# Altium PCB PCB.PcbDoc
Units mm, origin at the board's own origin, x right, y up, seen from the top; angles counter-clockwise.
Board outline 111.4 x 79.3 mm, 4 copper layers (Top, GND, PWR, Bottom), stack 1.35 mm thick; 107 components, 94 nets, 370 pads, 204 vias.
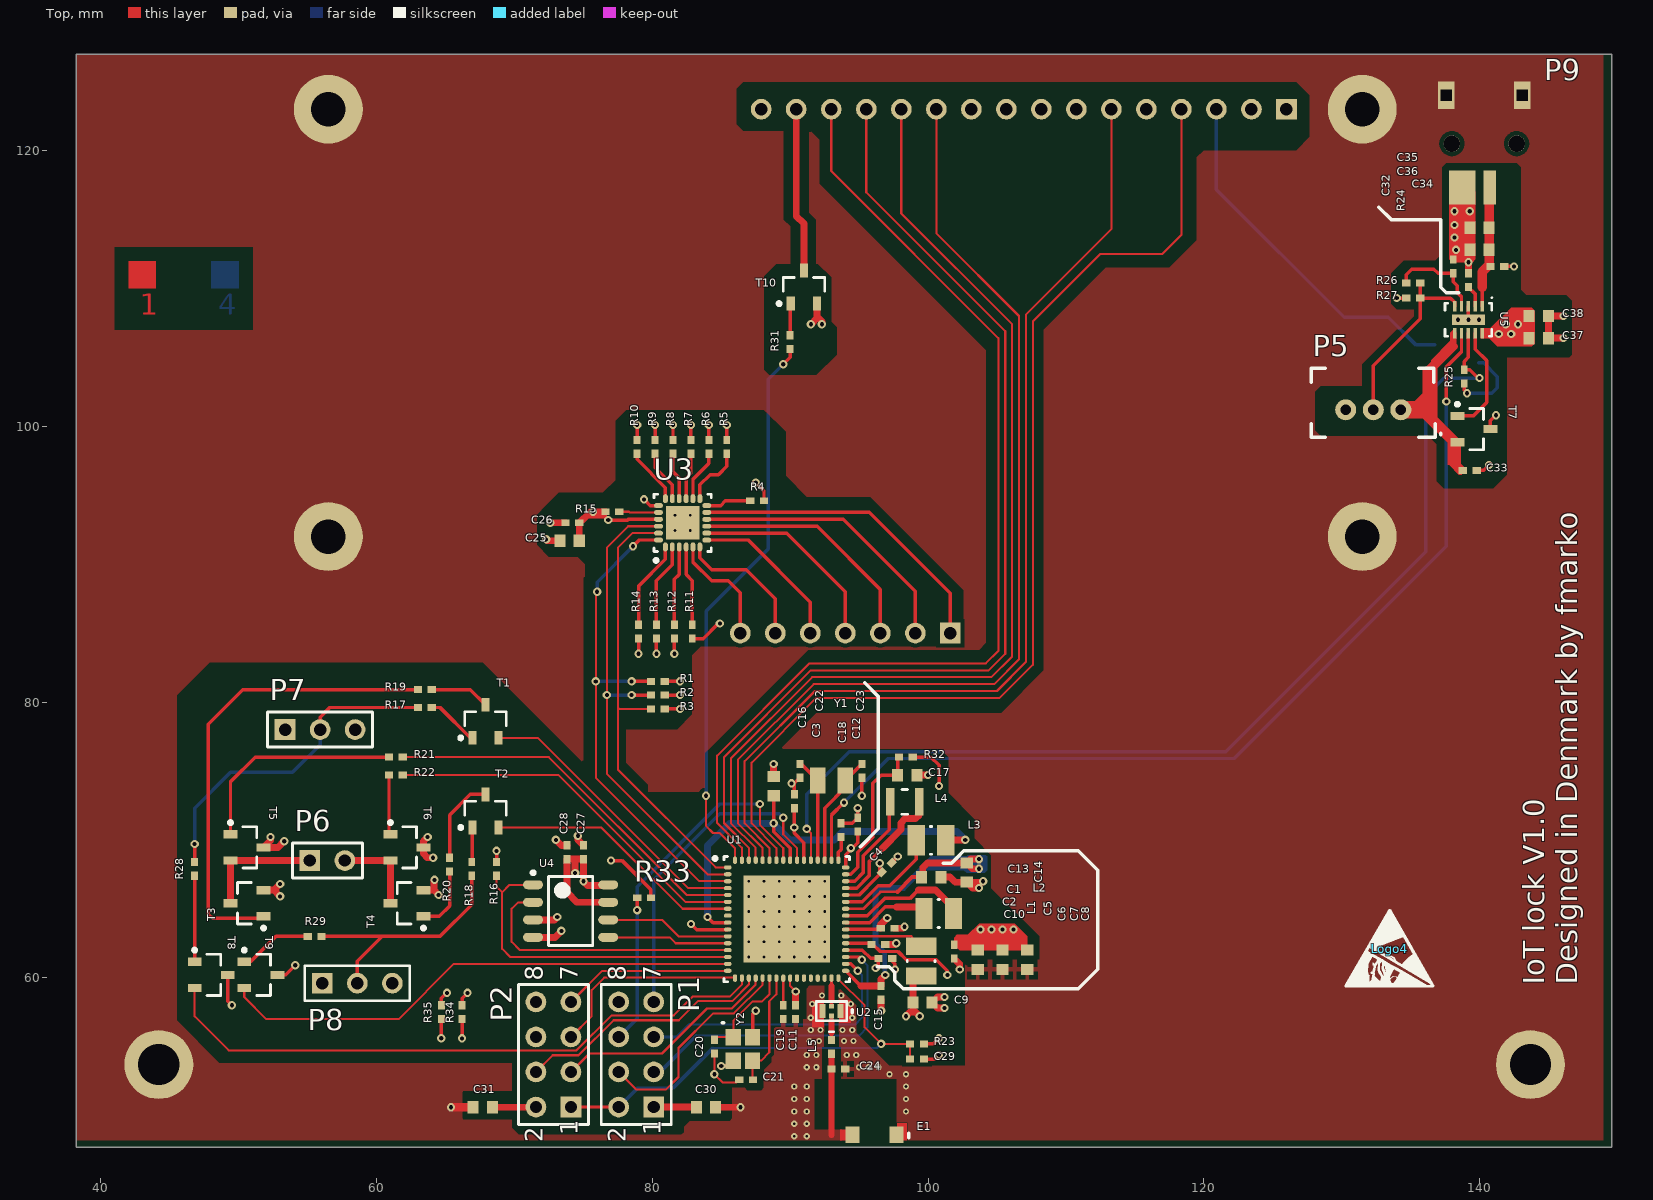
[diagram p0: Top view]
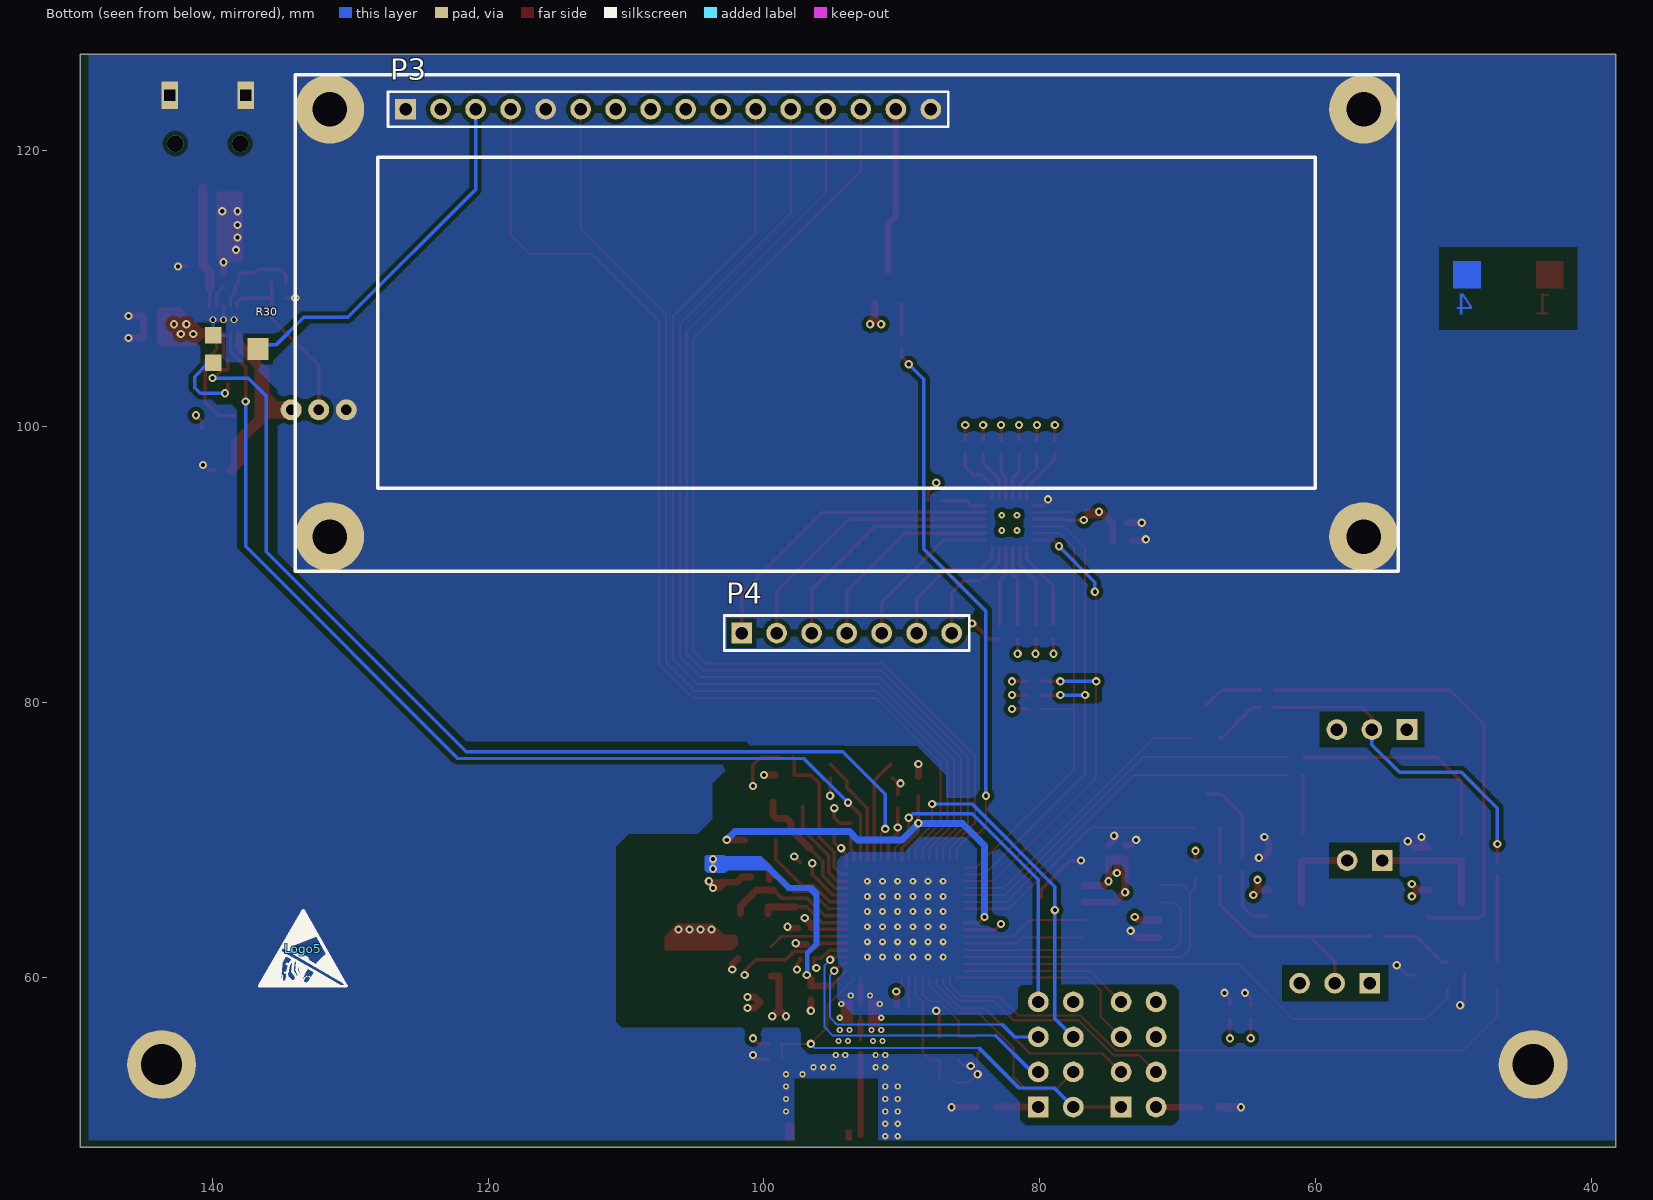
[diagram p1: Bottom view, seen from below]
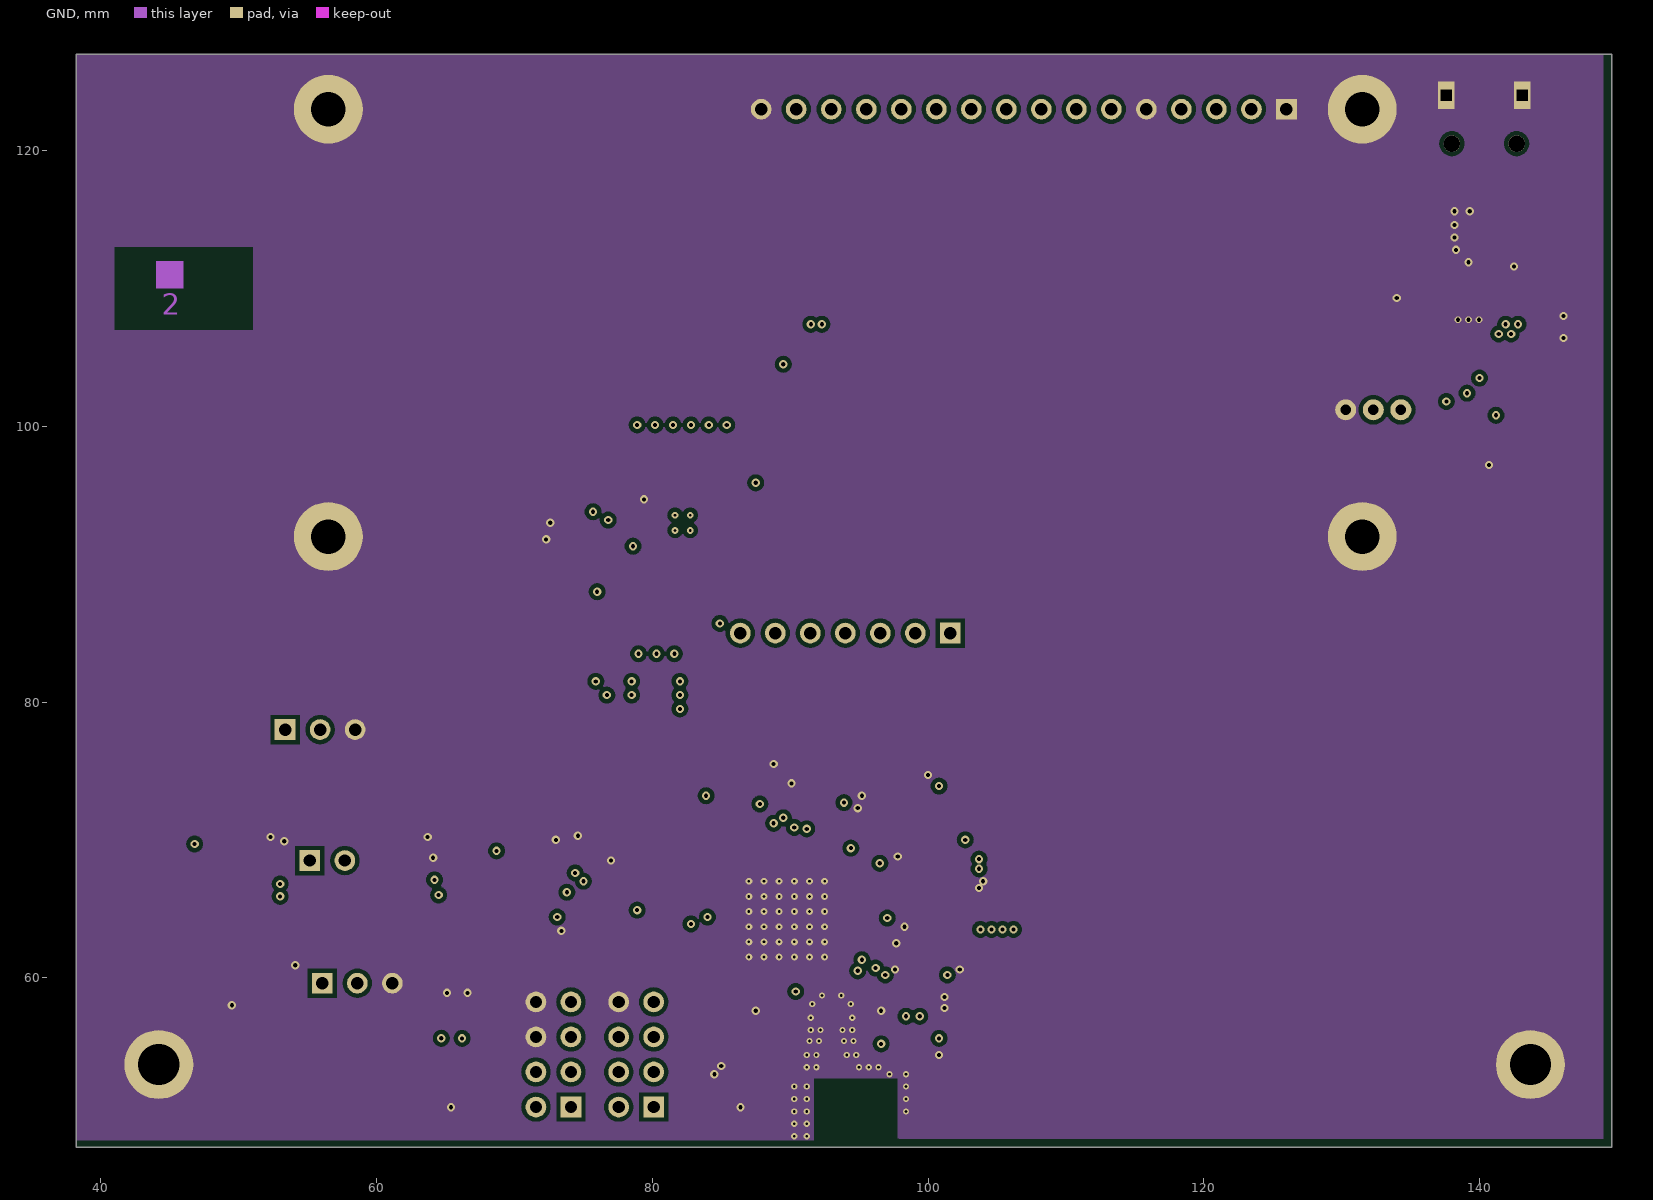
[diagram p2: GND]
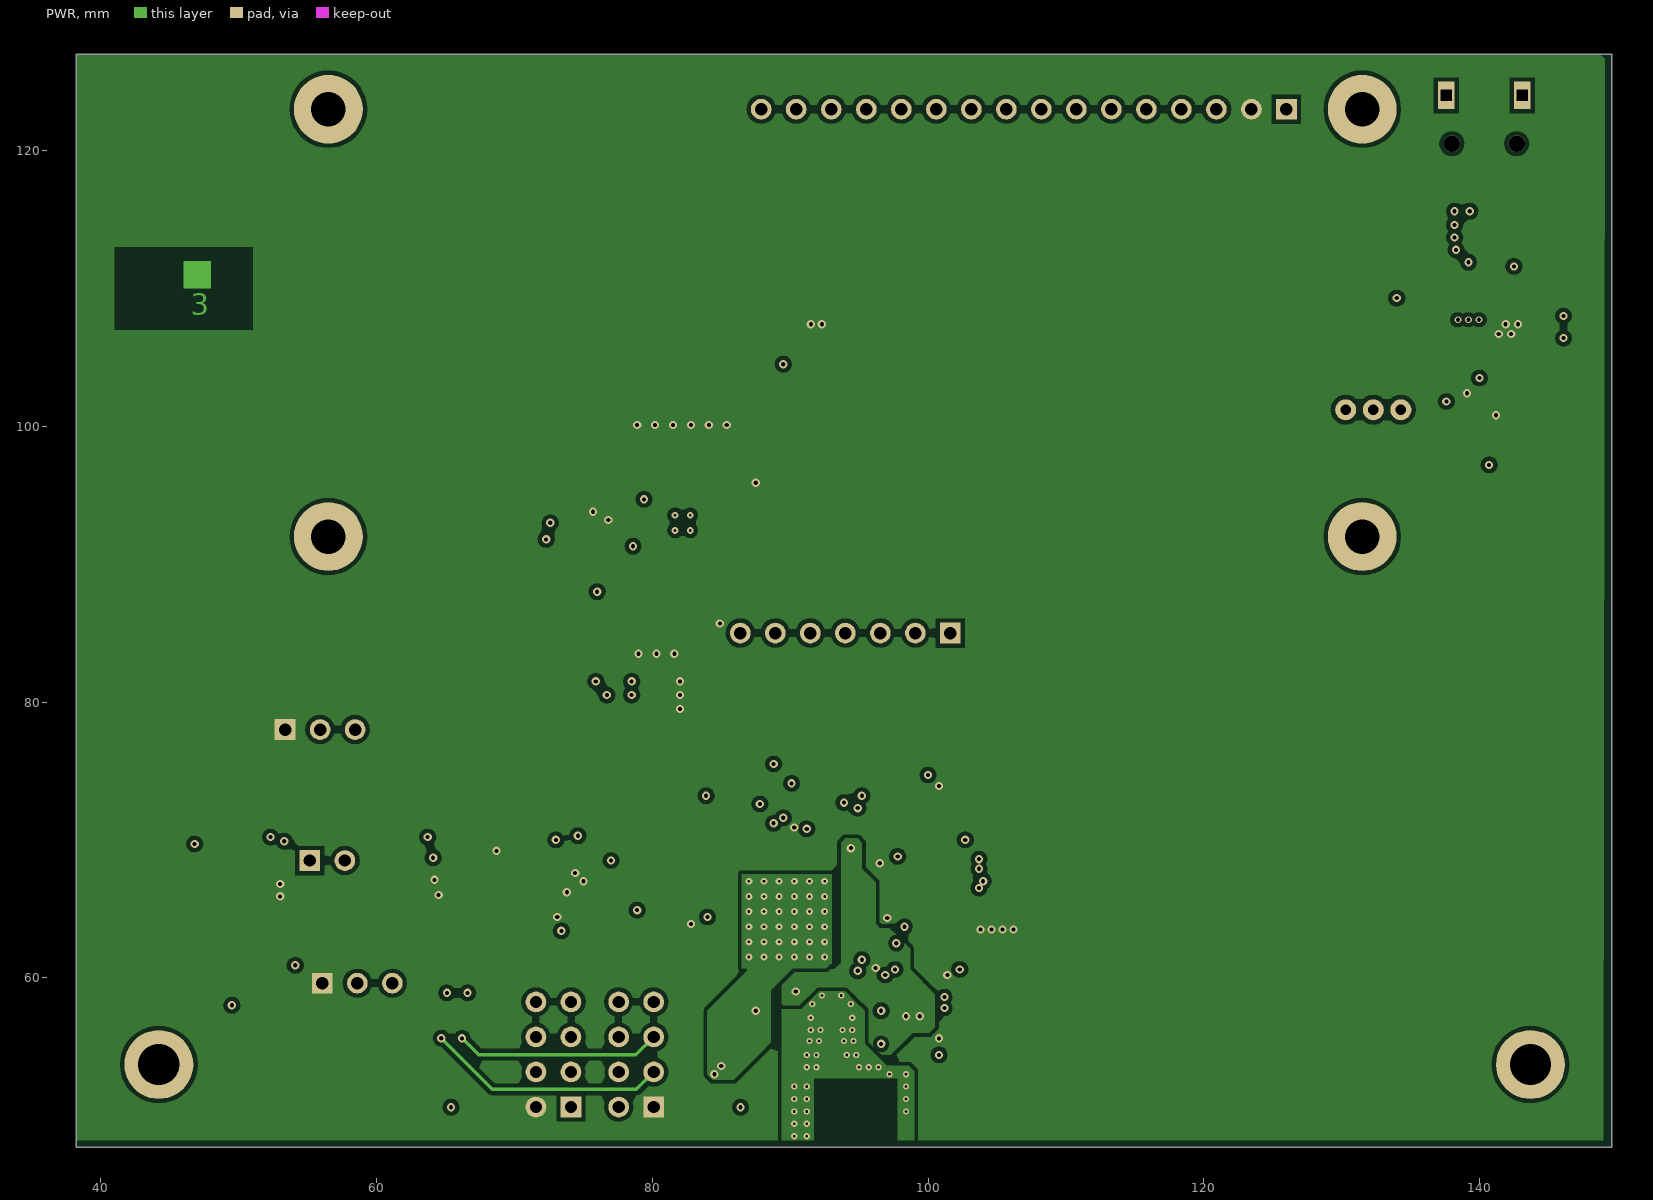
[diagram p3: PWR]

## Layer stack, top to bottom
Top Solder: solder mask 0.025, Solder Resist, Dk 3.5
Top: signal copper 0.035
Dielectric 1: core 0.255, FR-4, Dk 4.5
GND: signal copper 0.035
Dielectric 3: core 0.7, Dk 4.5
PWR: signal copper 0.035
Dielectric 2: core 0.255, Dk 4.5
Bottom: signal copper 0.035
Bottom Solder: solder mask 0.025, Solder Resist, Dk 3.5

## Board outline
38.2,47.7 38.2,127 149.6,127 149.6,47.7

## Design rules (kind name [scope] priority, off if disabled: settings)
Clearance [All] p1: gap=0.1 ignorepadtopadclearanceinfootprint=FALSE except(0.3: Arc-Poly Track-Poly SMDPad-Poly THPad-Poly Via-Poly Fill-Poly Poly-Poly)
PolygonConnect [All] p1: thpad.connectstyle=Direct thpad.reliefconductorwidth=0.254 thpad.reliefentries=4 thpad.polygonreliefangle="90 Angle" thpad.airgapwidth=0.254 smdpad.connectstyle=Relief smdpad.reliefconductorwidth=0.3 smdpad.reliefentries=4 smdpad.polygonreliefangle="90 Angle" smdpad.airgapwidth=0.3 via.connectstyle=Direct via.reliefconductorwidth=0.254 via.reliefentries=4 via.polygonreliefangle="90 Angle" via.airgapwidth=0.254
RoutingVias [All] p1: holewidth=0.711 width=1.27 viastyle="Through Hole" minholewidth=0.711 minwidth=1.27 maxholewidth=0.711 maxwidth=1.27
SolderMaskExpansion [All] p1: expansion=0
Width [All] p1: maxlimit=0.8 minlimit=0.1 preferedwidth=0.25
30 further rules are at their usual default settings.

## Classes and differential pairs
component class SH7: P3 P4 P5 P6 P7 P8 P9 R30 R31 T10
component class SH6: C32 C33 C34 C35 C36 C37 C38 R24 R25 R26 R27 T7 U5
component class SH5: C29 C30 C31 P1 P2 R23 R33 R34 R35
component class SH4: R17 R18 R19 R20 R21 R22 T1 T2 T3 T4 T5 T6
component class SH3: C27 C28 R16 U4
component class SH2: C25 C26 R4 R5 R6 R7 R8 R9 R10 R11 R12 R13 R14 R15 U3
component class SH1: C1 C2 C3 C4 C5 C6 C7 C8 C9 C10 C11 C12 C13 C14 C15 C16 C17 C18 C19 C20 C21 C22 C23 C24 E1 L1 L2 L3 L4 L5 R1 R2 R3 R28 R29 R32 T8 T9 U1 U2 Y1 Y2

## Components (designator, comment, footprint, x,y, rotation, side; value= is the part's Value field where it differs from the comment)
C1 "GRM1555C1HR50BA01D" 0402 97.069,63.59 r180 top value=4.7uF
C2 "GRM1555C1HR50BA01D" 0402 96.4,62.4 r180 top value=4.7uF
C3 "GRM1555C1HR50BA01D" 0402 90.3,72.8 r270 top value=4.7uF
C4 "GRM1555C1HR50BA01D" 0402 97,68 r225 top value=0.1uF
C5 "GRM1555C1HR50BA01D" 0402 101.9,61.9 r90 top value=0.1uF
C6 "GRM1555C1HR50BA01D" 1608[0603] 103.6,61.3 r90 top value=22uF
C7 "GRM1555C1HR50BA01D" 1608[0603] 105.4,61.3 r90 top value=22uF
C8 "GRM1555C1HR50BA01D" 1608[0603] 107.2,61.3 r90 top value=10uF
C9 "GRM1555C1HR50BA01D" 1608[0603] 99.6,58.2 r180 top value=10uF
C10 "GRM1555C1HR50BA01D" 0402 96.9,61.4 r180 top value=0.1uF
C11 "GRM1555C1HR50BA01D" 0402 90.4,57.5 r90 top value=0.1uF
C12 "GRM1555C1HR50BA01D" 0402 94.9,71.1 r270 top value=0.1uF
C13 "GRM1555C1HR50BA01D" 1608[0603] 100.244,67.298 r180 top value=22uF
C14 "GRM1555C1HR50BA01D" 1608[0603] 102.808,67.627 r90 top value=22uF
C15 "GRM1555C1HR50BA01D" 0402 96.6,58.9 r90 top value=1uF
C16 "GRM1555C1HR50BA01D" 1608[0603] 88.8,73.9 r270 top value=10uF
C17 "GRM1555C1HR50BA01D" 1608[0603] 98.5,74.7 r180 top value=10uF
C18 "GRM1555C1HR50BA01D" 0402 93.7,70.7 r270 top value=0.1uF
C19 "GRM1555C1HR50BA01D" 0402 89.5,57.5 r90 top value=0.1uF
C20 "GRM1555C1HR50BA01D" 0402 84.5,55 r90 top value=6.2pF
C21 "GRM1555C1HR50BA01D" 0402 86.8,52.6 r0 top value=6.2pF
C22 "GRM1555C1HR50BA01D" 0402 90.7,75 r90 top value=10pF
C23 "GRM1555C1HR50BA01D" 0402 95.2,75 r90 top value=10pF
C24 "GRM1555C1HR50BA01D" 0402 93.5,53.375 r180 top value=0.5pF
C25 "GRM1555C1HR50BA01D" 1608[0603] 74,91.7 r0 top value=10uF
C26 "GRM1555C1HR50BA01D" 0402 74.2,93 r0 top value=0.1uF
C27 "GRM1555C1HR50BA01D" 0402 75,69.1 r270 top value=4.7uF
C28 "GRM1555C1HR50BA01D" 0402 73.8,69.1 r270 top value=0.1uF
C29 "GRM1555C1HR50BA01D" 0402 99.2,54.1 r180 top value=1uF
C30 "GRM1555C1HR50BA01D" 1608[0603] 83.9,50.6 r180 top value=22uF
C31 "GRM1555C1HR50BA01D" 1608[0603] 67.7,50.6 r0 top value=22uF
C32 "GRM1555C1HR50BA01D" 0402 138.1,111.6 r270 top value=0.1uF
C33 "GRM1555C1HR50BA01D" 0402 139.3,96.8 r180 top value=1uF
C34 "GRM1555C1HR50BA01D" 0402 141.3,111.6 r180 top value=1uF
C35 "GRM1555C1HR50BA01D" 1608[0603] 140,114.4 r0 top value=22uF
C36 "GRM1555C1HR50BA01D" 1608[0603] 140,112.8 r0 top value=22uF
C37 "GRM1555C1HR50BA01D" 1608[0603] 144.3,106.4 r180 top value=22uF
C38 "GRM1555C1HR50BA01D" 1608[0603] 144.3,108 r180 top value=22uF
E1 "AH316M245001-T" AH316M245001-T 96.117,48.604 r180 top
L1 "LQM2HPN2R2MG0L" INDC2520X10N 99.5,61.2 r90 top
L2 "LQM2HPN1R0MG0L" INDC2520X10N 100.774,64.656 r180 top
L3 "LQM2HPN2R2MG0L" INDC2520X10N 100.216,69.965 r180 top
L4 "CBC2518T100M" INDC2518X20N 98.312,72.759 r0 top
L5 "LQG15HS3N3S02D" 0402-A 93,54.975 r270 top value=3.3nH
Logo4 "ESD Susceptible" ESD_Overlay_Medium 133.485,62.116 r0 top
Logo5 "ESD Susceptible" ESD_Overlay_Medium 133.428,62.114 r180 bottom
P1 "Header 4X2" HDR2X4 80.1,50.62 r90 top
P2 "Header 4X2" HDR2X4 74.1,50.62 r90 top
P3 "Header 16" HDR1X16 126,123 r180 bottom
P4 "Header 7" HDR1X7 101.62,85 r180 bottom
P5 "B3B-PH-K-S" B3B-PH-K-S 132.3,101.2 r0 top
P6 "Header 2" HDR1X2 55.16,68.5 r0 top
P7 "Header 3" HDR1X3 53.36,78 r0 top
P8 "Header 3" HDR1X3 56.06,59.6 r0 top
P9 "PJ-072C-SMT-TR" PJ-072C-SMT-TR_HOUSING 140.35,121.8 r270 top
R1 "Res Semi" 0402 80.4,81.5 r0 top value=10k
R2 "Res Semi" 0402 80.4,80.5 r0 top value=10k
R3 "Res Semi" 0402 80.4,79.5 r0 top value=10k
R4 "Res Semi" 0402 87.6,94.6 r180 top value=10k
R5 "Res Semi" 0402 85.4,98.5 r270 top value=10k
R6 "Res Semi" 0402 84.1,98.5 r270 top value=10k
R7 "Res Semi" 0402 82.8,98.5 r270 top value=10k
R8 "Res Semi" 0402 81.5,98.5 r270 top value=10k
R9 "Res Semi" 0402 80.2,98.5 r270 top value=10k
R10 "Res Semi" 0402 78.9,98.5 r270 top value=10k
R11 "Res Semi" 0402 82.9,85.1 r270 top value=10k
R12 "Res Semi" 0402 81.6,85.1 r270 top value=10k
R13 "Res Semi" 0402 80.3,85.1 r270 top value=10k
R14 "Res Semi" 0402 79,85.1 r270 top value=10k
R15 "Res Semi" 0402 77.1,93.8 r0 top value=10k
R16 "Res Semi" 0402 68.7,67.9 r90 top value=100k
R17 "Res Semi" 0402 63.5,79.6 r0 top value=10k
R18 "Res Semi" 0402 66.9,67.9 r270 top value=10k
R19 "Res Semi" 0402 63.5,80.9 r180 top value=10k
R20 "Res Semi" 0402 65.3,68.2 r90 top value=10k
R21 "Res Semi" 0402 61.4,76 r180 top value=10k
R22 "Res Semi" 0402 61.4,74.7 r0 top value=10k
R23 "Res Semi" 0402 99.2,55.2 r0 top value=10k
R24 "Res Semi" 0402 139.2,110.6 r270 top value=1k
R25 "Res Semi" 0402 138.9,103.6 r270 top value=100k
R26 "Res Semi" 0402 135.2,110.4 r0 top value=CALC
R27 "Res Semi" 0402 135.2,109.3 r0 top value=CALC
R28 "Res Semi" 0402 46.8,67.9 r270 top value=10k
R29 "Res Semi" 0402 55.5,63 r180 top value=10k
R30 "TC33X-2-103E" TC33X-2-XXX_HOUSING 138.35,105.6 r270 bottom
R31 "Res Semi" 0402 90,106.1 r90 top value=10k
R32 "Res Semi" 0402 98.4,76 r0 top value=0
R33 "Res Semi" 0402 79.4,65.8 r180 top value=2.7k
R34 "Res Semi" 0402 66.2,57.5 r270 top value=100k
R35 "Res Semi" 0402 64.7,57.5 r270 top value=100k
T1 "NVR1P02T1G" SOT95P237X111-3N 67.9,78.6 r90 top
T2 "NVR1P02T1G" SOT95P237X111-3N 67.9,72.1 r90 top
T3 "NVR1P02T1G" SOT95P237X111-3N 50.6,65.4 r180 top
T4 "NVR1P02T1G" SOT95P237X111-3N 62.2,65.4 r180 top
T5 "NVR1P02T1G" SOT95P237X111-3N 50.6,69.45 r0 top
T6 "NVR1P02T1G" SOT95P237X111-3N 62.2,69.45 r0 top
T7 "NVR1P02T1G" SOT95P237X111-3N 139.6,99.8 r0 top
T8 "NVR1P02T1G" SOT95P237X111-3N 48,60.2 r0 top
T9 "NVR1P02T1G" SOT95P237X111-3N 51.6,60.2 r0 top
T10 "NVR1P02T1G" SOT95P237X111-3N 91,110.1 r90 top
U1 "CC3220" PQFN50P900X900X100_HS-65N 89.75,64.25 r0 top
U2 "DEA202450BT-1294C1-H" DEA202450BT-1294C1-H_LAYOUT 93,57.575 r180 top
U3 "TCA8418" PQFN50P400X400X80_HS-25N 82.2,93 r90 top
U4 "MX25R3235FM1IL0" SOP127P600X175-8N 74.075,64.835 r0 top
U5 "BQ25060" SON50P200X80_HS-11N 139.2,107.73 r270 top
Y1 "ABS07-32.768KHZ-9-T" ABS07-32.768KHZ-9-T_HS 93,74.3 r0 top
Y2 "FA-20H 40.0000MF10Z-K3" "FA-20H 40.0000MF10Z-K3_HS" 86.575,54.839 r270 top

## Footprints (in the part's own frame and the unit in brackets; to place one, negate y for a bottom-side part, rotate by r counter-clockwise, add the part's x,y. Pads: shape width x height; smd on the part's side, far side on the other; paste and mask are expansions set on the pad)
0402 [mm] "Chip Capacitor, Body 1.0x0.5mm, IPC High Density"
  rect 0.6x0.5 smd: 1(-0.5,0) 2(0.5,0)
  body extent -0.55,-0.3 0.55,0.3, height 1.3
0402-A [mm] "Chip Inductor, Body 1.0x0.5mm, IPC High Density"
  rect 0.6x0.5 smd: 1(-0.5,0) 2(0.5,0)
  silkscreen extent -1.1,-0.15 -1.1,0.15, body extent -0.55,-0.3 0.55,0.3, height 0.55
1608[0603] [mm] "Chip Capacitor, Body 1.6x0.8mm, IPC High Density"
  rect 0.8x0.9 smd: 1(-0.7,0) 2(0.7,0)
  body extent -0.87,-0.48 0.87,0.48, height 1.3
ABS07-32.768KHZ-9-T_HS [mm]
  rect 1.1x1.9 smd: 1(-1,0) 2(1,0)
  body extent -1.6,-0.75 1.6,0.75, height 0.89
AH316M245001-T [mm]
  rect 1x1.2 smd: 1(-1.6,0) 2(1.6,0)
  silkscreen extent -2.5,-0.1 -2.5,0.2, body extent -1.6,-0.8 1.6,0.8, height 0.6
B3B-PH-K-S [mil]
  round 60 hole 30: 1(78.74,0) 2(0,0) 3(-78.74,0)
  silkscreen extent -177,-79 193,118, body extent -156,-67 156,110, height 236
DEA202450BT-1294C1-H_LAYOUT [mm]
  rect 0.35x0.35 smd: 1(0,-0.35) 3(0,0.35)
  rect 0.45x1 smd: 2(-0.65,0) 4(0.65,0)
  silkscreen extent -1.5,-0.7 1.1,0.7, body extent -1.1,-0.7 1.1,0.7, height 0.9
ESD_Overlay_Medium [mm]
  silkscreen extent -3.22,-2.77 3.17,2.8
"FA-20H 40.0000MF10Z-K3_HS" [mm]
  rect 1.2x1.1 smd: 1(-0.85,-0.7) 2(0.85,-0.7) 3(0.85,0.7) 4(-0.85,0.7)
  silkscreen extent -1.9,-1.5 -1.9,-1.4, body extent -1.25,-1 1.25,1, height 0.6
HDR1X2 [mm] "Connector; Header; 2 Position"
  rect 1.5x1.5 hole 0.9: 1(0,0)
  round 1.5 hole 0.9: 2(2.54,0)
  silkscreen extent -1.27,-1.27 3.81,1.27
HDR1X3 [mm] "Connector; Header; 3 Position"
  rect 1.5x1.5 hole 0.9: 1(0,0)
  round 1.5 hole 0.9: 2(2.54,0) 3(5.08,0)
  silkscreen extent -1.27,-1.27 6.35,1.27
HDR1X7 [mm] "Connector; Header; 7 Position"
  rect 1.5x1.5 hole 0.9: 1(0,0)
  round 1.5 hole 0.9: 2(2.54,0) 3(5.08,0) 4(7.62,0) 5(10.16,0) 6(12.7,0) 7(15.24,0)
  silkscreen extent -1.27,-1.27 16.51,1.27
HDR1X16 [mm] "Connector; Header; 16 Position"
  rect 1.5x1.5 hole 0.9: 1(0,0)
  round 1.5 hole 0.9: 2(2.54,0) 3(5.08,0) 4(7.62,0) 5(10.16,0) 6(12.7,0) 7(15.24,0) 8(17.78,0) 9(20.32,0) 10(22.86,0) 11(25.4,0) 12(27.94,0) 13(30.48,0) 14(33.02,0) 15(35.56,0) 16(38.1,0)
  silkscreen extent -1.27,-1.27 39.37,1.27
HDR2X4 [mm] "Connector; Header; 4x2 Position"
  rect 1.5x1.5 hole 0.9: 1(0,0)
  round 1.5 hole 0.9: 2(0,2.54) 3(2.54,0) 4(2.54,2.54) 5(5.08,0) 6(5.08,2.54) 7(7.62,0) 8(7.62,2.54)
  silkscreen extent -1.27,-1.27 8.89,3.81
INDC2518X20N [mm] "Chip Inductor, 2-Leads, Body 2.50x1.80mm, IPC Medium Density"
  rect 0.6x2 smd: 1(-1.05,0) 2(1.05,0)
  silkscreen extent -0.2,-0.9 0.2,0.9, body extent -1.35,-1 1.35,1, height 2
INDC2520X10N [mm] "Chip Inductor, 2-Leads, Body 2.50x2.00mm, IPC Medium Density"
  rect 1.25x2.22 smd: 1(-1.075,0) 2(1.075,0)
  silkscreen extent -0.05,-1.01 0.05,1.01, body extent -1.35,-1.1 1.35,1.1, height 1
PJ-072C-SMT-TR_HOUSING [mm]
  rect 2.45x0.9 smd: 1(4.475,0.4)
  rect 2.45x1.9 smd: 2(4.475,-1.6)
  rect 2x1.2 hole 0.8 square: 3(-2.2,2.75) 4(-2.2,-2.75)
  round 1.2 hole 1.2 unplated paste+0 mask+0: 10(1.3,2.35) 11(1.3,-2.35)
  body extent -5.2,-2.9 5.2,2.9, height 4.85
PQFN50P400X400X80_HS-25N [mm] "PQFN, 24-Leads, Body 4.00x4.00mm, Pitch 0.50mm, Thermal Pad 2.45x2.45mm, IPC Medium Density"
  oval 0.65x0.35 smd: 1(-1.75,1.25) 2(-1.75,0.75) 3(-1.75,0.25) 4(-1.75,-0.25) 5(-1.75,-0.75) 6(-1.75,-1.25) 13(1.75,-1.25) 14(1.75,-0.75) 15(1.75,-0.25) 16(1.75,0.25) 17(1.75,0.75) 18(1.75,1.25)
  oval 0.35x0.65 smd: 7(-1.25,-1.75) 8(-0.75,-1.75) 9(-0.25,-1.75) 10(0.25,-1.75) 11(0.75,-1.75) 12(1.25,-1.75) 19(1.25,1.75) 20(0.75,1.75) 21(0.25,1.75) 22(-0.25,1.75) 23(-0.75,1.75) 24(-1.25,1.75)
  rect 2.45x2.45 smd: 25(0,0)
  silkscreen extent -2.85,-2.08 2.08,2.07, body extent -2.07,-2.08 2.08,2.07, height 0.8
PQFN50P900X900X100_HS-65N [mm] "PQFN, 64-Leads, Body 9.00x9.00mm, Pitch 0.50mm, Thermal Pad 6.30x6.30mm, IPC Medium Density"
  oval 0.55x0.3 smd: 1(-4.275,3.75) 2(-4.275,3.25) 3(-4.275,2.75) 4(-4.275,2.25) 5(-4.275,1.75) 6(-4.275,1.25) 7(-4.275,0.75) 8(-4.275,0.25) 9(-4.275,-0.25) 10(-4.275,-0.75) 11(-4.275,-1.25) 12(-4.275,-1.75) 13(-4.275,-2.25) 14(-4.275,-2.75) 15(-4.275,-3.25) 16(-4.275,-3.75) 33(4.275,-3.75) 34(4.275,-3.25) 35(4.275,-2.75) 36(4.275,-2.25) 37(4.275,-1.75) 38(4.275,-1.25) 39(4.275,-0.75) 40(4.275,-0.25) 41(4.275,0.25) 42(4.275,0.75) 43(4.275,1.25) 44(4.275,1.75) 45(4.275,2.25) 46(4.275,2.75) 47(4.275,3.25) 48(4.275,3.75)
  oval 0.3x0.55 smd: 17(-3.75,-4.275) 18(-3.25,-4.275) 19(-2.75,-4.275) 20(-2.25,-4.275) 21(-1.75,-4.275) 22(-1.25,-4.275) 23(-0.75,-4.275) 24(-0.25,-4.275) 25(0.25,-4.275) 26(0.75,-4.275) 27(1.25,-4.275) 28(1.75,-4.275) 29(2.25,-4.275) 30(2.75,-4.275) 31(3.25,-4.275) 32(3.75,-4.275) 49(3.75,4.275) 50(3.25,4.275) 51(2.75,4.275) 52(2.25,4.275) 53(1.75,4.275) 54(1.25,4.275) 55(0.75,4.275) 56(0.25,4.275) 57(-0.25,4.275) 58(-0.75,4.275) 59(-1.25,4.275) 60(-1.75,4.275) 61(-2.25,4.275) 62(-2.75,4.275) 63(-3.25,4.275) 64(-3.75,4.275)
  rect 6.3x6.3 smd: 65(0,0)
  silkscreen extent -5.32,-4.55 4.55,4.55, body extent -4.55,-4.55 4.55,4.55, height 1
SON50P200X80_HS-11N [mm] "SON, 10-Leads, Body 3.00x2.00mm, Pitch 0.50mm, Thermal Pad 2.40x0.79mm, IPC Medium Density"
  rect 0.75x0.25 smd: 1(-0.97,1) 2(-0.97,0.5) 3(-0.97,0) 4(-0.97,-0.5) 5(-0.97,-1) 6(0.97,-1) 7(0.97,-0.5) 8(0.97,0) 9(0.97,0.5) 10(0.97,1)
  rect 0.79x2.4 smd: 11(0,0)
  silkscreen extent -1.65,-1.7 1.2,1.75, body extent -1.05,-1.55 1.05,1.55, height 0.8
SOP127P600X175-8N [mm] "SOP, 8-Leads, Body 4.90x3.90mm, Pitch 1.27mm, IPC Medium Density"
  oval 1.45x0.65 smd: 1(-2.725,1.905) 2(-2.725,0.635) 3(-2.725,-0.635) 4(-2.725,-1.905) 5(2.725,-1.905) 6(2.725,-0.635) 7(2.725,0.635) 8(2.725,1.905)
  silkscreen extent -2.85,-2.5 1.6,2.9, body extent -2,-2.5 2,2.5, height 1.75
SOT95P237X111-3N [mm] "SOT23, 3-Leads, Body 2.92x2.37mm, Pitch 0.95mm, IPC Medium Density"
  rect 1x0.6 smd: 1(-1.2,0.95) 2(-1.2,-0.95) 3(1.2,0)
  silkscreen extent -1.32,-1.5 0.7,1.92, body extent -0.7,-1.52 0.7,1.52, height 1.11
TC33X-2-XXX_HOUSING [mm]
  rect 1.2x1.2 smd: 1(-1,-1.6) 3(1,-1.6)
  rect 1.6x1.5 smd: 2(0,1.65)
  body extent -1.8,-1.91 1.8,2.05, height 1.13

## Part data
C1 C2 C3 C4 C5 C6 C7 C8 C9 C10 C11 C12 C13 C14 C15 C16 C17 C18 C19 C20 C21 C22 C23 C24 C25 C26 C27 C28 C29 C30 C31 C32 C33 C34 C35 C36 C37 C38: library part Cap, "Capacitor", LatestRevisionDate=17-Jul-2002, LatestRevisionNote="Re-released for DXP Platform.", PackageDescription="Radial Cap, Thru-Hole; 2 Leads; 0.3 in Pin Spacing", PackageReference=RAD-0.3, Published=8-Jun-2000, Publisher="Altium Limited"
E1: "2.4 GHz Antenna"
L1 L3: "Murata 2.2uH inductor"
L2: library part LQM2HPN2R2MG0L, "Murata 2.2uH inductor"
L4: "10 uH inductor, Taiyo Yuden"
L5: library part Inductor, "Inductor", Code_IEC=1005, Code_JEITA=0402, LatestRevisionDate=29-May-2009, LatestRevisionNote="IPC-7351 Footprint Added.", PackageDescription="Chip Inductor", PackageReference=0402-A, Published=8-Jun-2000, Publisher="Altium Limited"
Logo4 Logo5: library part ESD_Susceptible, "ESD Susceptible Symbol"
P1 P2: "Header, 4-Pin, Dual row", LatestRevisionDate=17-Jul-2002, LatestRevisionNote="Re-released for DXP Platform.", Publisher="Altium Limited"
P3: "Header, 16-Pin", LatestRevisionDate=17-Jul-2002, LatestRevisionNote="Re-released for DXP Platform.", Publisher="Altium Limited"
P4: "Header, 7-Pin", LatestRevisionDate=17-Jul-2002, LatestRevisionNote="Re-released for DXP Platform.", Publisher="Altium Limited"
P5: "JST connector, 3-pin, 2mm pitch"
P6: "Header, 2-Pin", LatestRevisionDate=17-Jul-2002, LatestRevisionNote="Re-released for DXP Platform.", Publisher="Altium Limited"
P7 P8: "Header, 3-Pin", LatestRevisionDate=17-Jul-2002, LatestRevisionNote="Re-released for DXP Platform.", Publisher="Altium Limited"
P9: "CUI Barrel power connector, 1X3.4mm"
R1 R2 R3 R4 R5 R6 R7 R8 R9 R10 R11 R12 R13 R14 R15 R16 R17 R18 R19 R20 R21 R22 R23 R24 R25 R26 R27 R28 R29 R31 R32 R33 R34 R35: "Semiconductor Resistor", LatestRevisionDate=17-Jul-2002, LatestRevisionNote="Re-released for DXP Platform.", PackageDescription="Axial Device, Thru-Hole; 2 Leads; 0.5 in Pin Spacing", PackageReference=AXIAL-0.5, Published=8-Jun-2000, Publisher="Altium Limited"
R30: "SMD trimmer resistor, 10k"
T1 T2 T3 T4 T5 T6 T7 T8 T9 T10: "P-Channel MOSFET"
U1: "WiFi IoT controller, TI"
U3: "I2C keyboard controller, TI"
U4: "Macronix 32 Mbit SPI Flash memory"
U5: "Li-Ion standalone charger, TI"
Y1: "32.768 kHz Crystal, Abracon LLC"
Y2: "Crystal, 40 MHz, 10pF, Epson"

## Free pads (board coordinates)
  round 5 hole 2.5: 13(56.5,92) 13(56.5,123) 13(131.5,92) 13(131.5,123)
  round 5 hole 3: 14(44.2,53.7) 14(143.7,53.7)

## Via types
v1: diameter 0.6, hole 0.3, Top to Bottom, tented both sides, 123 vias
v2: diameter 0.5, hole 0.2, Top to Bottom, 40 vias
v3: diameter 0.45, hole 0.2, Top to Bottom, tented both sides, 38 vias
v4: diameter 0.5, hole 0.3, Top to Bottom, 3 vias

## Nets (pads, with @x,y where several pads share a name; then routed paths per layer and width w, separated by ;. In a path a pad name is that pad's centre, name@x,y a point inside that pad or via, vN(x,y) a via of type N, cw(c..) or ccw(c..) an arc to the next point about the centre after c; other vN are vias at no path point)
GND: C1.1 C2.1 C3.1 C4.1 C5.1 C6.1 C7.1 C8.1 C9.1 C10.1 C11.1 C12.1 C13.1 C14.1 C15.1 C16.1 C17.1 C18.1 C19.1 C20.1 C21.1 C22.1 C23.1 C24.1 C24.2 C25.1 C26.1 C27.1 C28.1 C29.1 C30.1 C31.1 C32.1 C33.1 C34.1 C35.1 C36.1 C37.1 C38.1 E1.1 E1.2 L5.2 P1.8 P2.6 P2.8 P3.1 P3.5 P3.16 P5.3 P7.3 P8.3 P9.2 P9.3 P9.4 pad.13 pad.14 R24.1 R27.1 R30.1 R33.1 R34.1 R35.1 T5.3 T6.3 T8.3 T9.3 U1.65 U2.2 U2.4 U3.19 U4.4 U5.3 U5.11 Y2.2 Y2.4 | length 68.8
  Top w0.15: C20.1 v1(84.5,53) 85.1,52.4 86.1,52.4 C21.1
  Top w0.25: T8.3 49.2,58.3 v1(49.5,58) ; T9.3 53.4,60.2 v1(54.1,60.9) ; R35.1 64.7,58.5 v1(65.1,58.9) ; R34.1 66.2,58.5 v1(66.6,58.9) ; v1(77,68.5) 77.8,68.5 79.9,66.4 R33.1 ; v1(79.4,94.7) 79.85,94.25 U3.19 ; C20.1@84.4,54.6 C20.1 ; v1(85,53.6) 85.486,53.6 Y2.2 ; Y2.4 87.275,57.375 v1(87.5,57.6) ; v1(90.1,74.1) v1@90.3,74.1 ; C3.1 v1@90.3,74.1 ; C22.1 v1@90.3,74.1 ; C18.1 94.5,71.2 C12.1 v1(94.9,72.3) ; v1(95.2,73.2) C23.1 ; C4.1 v1(97.8,68.8) ; C10.1 97.3,61.3 97.6,61 v1(97.6,60.6) ; v1@97.6,62.4 v1(97.7,62.5) ; C29.1 100.5,54.1 v1(100.8,54.4) ; v1(134,109.3) R27.1 ; v4(139.2,107.73) U5.3 ; C36.1@139.2,112.7 C36.1 ; C33.1 140.3,96.8 v1(140.7,97.2) ; C34.1 v1(142.5,111.6)
  Top w0.45: 93,48.604 C24.2 L5.2
  Top w0.5: v1(52.3,70.2) 52.3,69.95 T5.3 52.85,69.45 v1(53.3,69.9) ; v1(63.7,70.2) 63.4,69.9 T6.3 63.4,69 63.7,68.7 v1(64.1,68.7) ; U4.4 72.93,62.93 v1(73.4,63.4) ; v1(72.3,91.8) 72.4,91.7 C25.1 ; v1(72.6,93) C26.1 ; v1(73,70) 73.4,69.6 C28.1 ; v1(74.6,70.3) 74.6,70 C27.1 ; C30.1 v1(86.4,50.6) ; C16.1 v1(88.8,75.5) ; v1(96.6,57.6) C15.1 ; C2.1 v1@97.6,62.4 ; C1.1 98.19,63.59 v1(98.3,63.7) ; C17.1 v1(100,74.7) ; C13.1 101.602,67.298 101.973,66.927 C14.1 ; v1(101.2,57.8) 100.7,57.8 C9.1 100.7,58.6 v1(101.2,58.6) ; C5.1 102.3,61 v1(102.3,60.6) ; v1(103.7,66.5) 103.234,66.5 C14.1 ; v1(104,67) 103.927,66.927 C14.1 ; C32.1 138.1,112.6 v1(138.3,112.8) C36.1 ; R24.1 C36.1@139.2,112.7 ; v1(146.1,106.4) C37.1 C38.1 v1(146.1,108)
  Top w0.6: v1(65.4,50.6) C31.1
  other v1: 139.2,111.9 138.2,113.7 138.2,114.6 138.2,115.6 139.3,115.6
  other v2: 87,61.5 88.1,61.5 89.2,61.5 90.3,61.5 91.4,61.5 92.5,61.5 87,62.6 88.1,62.6 89.2,62.6 90.3,62.6 91.4,62.6 92.5,62.6 87,63.7 88.1,63.7 89.2,63.7 90.3,63.7 91.4,63.7 92.5,63.7 87,64.8 88.1,64.8 89.2,64.8 90.3,64.8 91.4,64.8 92.5,64.8 87,65.9 88.1,65.9 89.2,65.9 90.3,65.9 91.4,65.9 92.5,65.9 87,67 88.1,67 89.2,67 90.3,67 91.4,67 92.5,67
  other v3: 90.3,48.5 91.2,48.5 90.3,49.4 91.2,49.4 90.3,50.3 91.2,50.3 98.4,50.3 90.3,51.2 91.2,51.2 98.4,51.2 90.3,52.1 91.2,52.1 98.4,52.1 97.2,53 98.4,53 91.2,53.5 91.9,53.5 95,53.5 95.7,53.5 96.4,53.5 91.2,54.4 91.9,54.4 94.1,54.4 94.8,54.4 91.4,55.4 92.1,55.4 93.9,55.4 94.6,55.4 91.5,56.2 92.2,56.2 93.8,56.2 94.5,56.2 91.5,57.1 94.5,57.1 91.6,58.1 94.4,58.1 92.3,58.7 93.7,58.7
  other v4: 138.438,107.73 139.962,107.73
NetC9_2: C9.2 C10.2 C11.2 C12.2 L1.1 U1.25 U1.36 U1.48 | length 13
  Top w0.15: U1.25 90,59.4 v1(90.4,59)
  Top w0.25: U1.36 95.242,62 95.842,61.4 C10.2 96.4,60.9 v1(96.2,60.7) ; U1.48 94.025,68.925 94.9,69.8 C12.2 ; L1.1@98.9,60.1 L1.1@98.925,60.125
  Top w0.5: C11.2 v1(90.4,59) ; v1(98.4,57.2) 98.7,57.5 98.9,57.5 ; L1.1@98.9,60.1 C9.2 98.9,57.5 ; L1.1@98.925,60.125 L1.1 ; v1(99.4,57.2) 99.1,57.5 98.9,57.5
  other v1: 94.4,69.4
NetC13_2: C13.2 C14.2 C15.2 U1.33 U1.42 | length 16.7
  Top w0.2: U1.42 95.329,65 96.56,66.231 97.778,66.231
  Top w0.25: U1.33 95.125,59.4
  Top w0.3: 97.778,66.231 98.845,67.298
  Top w0.305: 98.845,67.298 C13.2
  Top w0.5: 95.125,59.4 C15.2 96.6,59.9 v1(96.9,60.2) ; C13.2@99.62,67.12 99.62,67.997 99.95,68.327 C14.2 ; v1(103.7,67.9) 103.234,67.9 C14.2 ; v1(103.7,68.6) 103.081,68.6 C14.2
NetC16_2: C16.2 L3.1 U1.9 U1.56 | length 33.9
  Top w0.25: v1(84,64.4) 84.4,64 U1.9 ; C16.2 v1(88.8,71.2) 88.8,70.6 90,69.4 U1.56 ; L3.1 101.291,69.909 101.3,69.9 L3.1@101.4,70
  Top w0.5: L3.1@101.4,70 v1(102.7,70)
  Bottom w0.5: v1(84,64.4) 84,69.6 85.6,71.2 v1(88.8,71.2) 90,70 93.2,70 93.8,70.6 102.1,70.6 v1(102.7,70)
NetC17_2: C17.2 R32.1 U1.47 | length 11
  Top w0.25: U1.47 94.4,67.5 94.9,68 94.9,69.1 96,70.2 96,74.1 96.6,74.7 C17.2 97.8,75.9 R32.1
NetC18_2: C18.2 U1.49 | length 1.8
  Top w0.25: U1.49 93.5,69.1 93.7,69.3 C18.2
NetC19_2: C19.2 U1.24 | length 2
  Top w0.15: C19.2 U1.24
NetC20_2: C20.2 U1.22 Y2.1 | length 7
  Top w0.15: C20.2@84.689,55.689 Y2.1 85.875,56.875 87.279,58.279 87.972,58.279 88.5,58.807 U1.22
NetC21_2: C21.2 U1.23 Y2.3 | length 8.5
  Top w0.15: C21.2@87.275,52.625 87.275,53.525 Y2.3 87.889,53.989 88.48,54.58 88.48,58.279 89,58.799 U1.23
  Top w0.25: Y2.3@87.275,53.525 Y2.3@87.3,53.5
NetC22_2: C22.2 U1.52 Y1.1 | length 7.5
  Top w0.25: C22.2@90.8,75.5 Y1.1 U1.52
NetC23_2: C23.2 U1.51 Y1.2 | length 8.1
  Top w0.25: U1.51 92.5,72.3 94,73.8 Y1.2 C23.2
NetC29_2: C29.2 P1.2 P2.1 R23.1 U1.32 | length 33.7
  Top w0.15: U1.32 93.5,59.9 95.4,58 95.4,56.4 v1(96.6,55.2) R23.1 C29.2
  Top w0.25: P2.1 P1.2
  Bottom w0.15: 84.4,54.9 96.3,54.9 v1(96.6,55.2)
  Bottom w0.25: P1.2 78.94,52 81.5,52 84.4,54.9
NetC32_2: C32.2 R26.1 U5.4 | length 6.9
  Top w0.25: R26.1 134.7,111 135.1,111.4 136.7,111.4 137,111.1 C32.2 138.1,110.5 138.4,110.2 138.4,109.7 138.7,109.4 U5.4
NetC33_2: C33.2 P5.1 T7.2 U5.6 | length 13.9
  Top w0.25: 136.6,101.2 136.7,101.1 ; 138.2,105.8 U5.6
  Top w0.5: P5.1 136.6,101.2 ; 138.2,105.8 136.7,104.3 136.7,101.1 136.7,100.55 T7.2 138.4,97.2 C33.2
NetL1_2: L1.2 U1.38 | length 7.7
  Top w0.2: 95.938,63 U1.38 98.775,63 L1.2
NetL2_1: L2.1 U1.41 | length 9.5
  Top w0.254: U1.41 95.602,64.5 96.85,65.749 98.693,65.749 99.302,66.358
  Top w0.508: 99.302,66.358 100.547,66.358 101.699,65.206 L2.1@101.699,64.656
NetL2_2: L2.2 U1.40 | length 6.6
  Top w0.254: U1.40 95.761,64 96.9,65.139 97.723,65.139
  Top w0.508: 97.723,65.139 99.699,65.139 L2.2
NetL3_2: L3.2 U1.43 | length 7.8
  Top w0.25: U1.43 95.218,65.5 96.381,66.663 97.22,66.663 99.141,68.584 L3.2
NetL4_1: L4.1 U1.46 | length 7.1
  Top w0.254: U1.46 94.673,67 95.3,67.627 95.3,68.858 97.186,70.744 L4.1@97.186,72.454
NetL4_2: L4.2 U1.45 | length 9.4
  Top w0.254: U1.45 94.819,66.5 95.721,67.402 95.721,68.425 96.677,69.381
  Top w0.505: 96.677,69.381 98.032,70.736 98.032,71.232 98.34,71.54 99.099,71.54 L4.2@99.362,71.802
  Top w0.506: L4.2@99.362,71.802 L4.2
NetL5_1: L5.1 U2.3 | length 1.7
  Top w0.25: L5.1 93,56 ; 93,56.8 U2.3
  Top w0.45: 93,56 93,56.8
NetP1_3: P1.3 R35.2 U1.35 | length 42
  Top w0.25: v1(64.694,55.606) 64.694,56.994 R35.2 ; U1.35 95,61.5 v1(95.2,61.3)
  PWR w0.25: v1(64.694,55.606) 68.4,51.9 78.84,51.9 P1.3
  Bottom w0.15: 83.2,55.8 95,55.8 95.6,56.4 95.6,60.9 v1(95.2,61.3)
  Bottom w0.25: P1.3 80.56,53.16 83.2,55.8
NetP1_4: P1.4 U1.21 | length 15.8
  Top w0.15: P1.4 78.82,51.9 81,51.9 81.9,52.8 81.9,54.9 84.414,57.414 85.914,57.414 88,59.5 U1.21
NetP1_5: P1.5 R34.2 U1.34 | length 36.6
  Top w0.25: v1(66.2,55.6) R34.2 ; U1.34 94.4,61 v1(94.9,60.5)
  PWR w0.25: v1(66.2,55.6) 67.4,54.4 78.8,54.4 P1.5
  Bottom w0.15: 82.7,56.6 94.7,56.6 95.2,57.1 95.2,60.2 v1(94.9,60.5)
  Bottom w0.25: P1.5 81.8,55.7 82.7,56.6
NetP1_6: P1.6 R33.2 U1.57 | length 28.5
  Top w0.15: v1(87.8,72.6) 87.8,71.1 89.5,69.4 U1.57
  Top w0.25: v1(78.9,64.9) R33.2
  Bottom w0.25: P1.6 78.9,57.04 v1(78.9,64.9) 78.9,66.6 84.9,72.6 v1(87.8,72.6)
NetP1_7: P1.7 U1.55 | length 23.9
  Top w0.15: v1(89.5,71.6) 89.5,70.4 90.5,69.4 U1.55
  Bottom w0.25: P1.7 80.1,67.1 84.9,71.9 89.2,71.9 v1(89.5,71.6)
NetP2_3: P2.3 U1.20 | length 16.5
  Top w0.15: P2.3 75.44,54.5 80.7,54.5 83.964,57.764 85.754,57.764 87.5,59.51 U1.20
NetP2_4: P2.4 U1.19 | length 18.5
  Top w0.15: P2.4 72.775,54.375 74.649,54.375 77.189,56.915 81.915,56.915 83.3,58.3 85.795,58.3 87,59.505 U1.19
NetP2_5: P2.5 U1.17 | length 14.8
  Top w0.15: P2.5 75.6,57.2 75.6,59.1 76.5,60 U1.17@85.975,60
  Top w0.25: U1.17@85.975,60 U1.17
NetP2_7: P2.7 U1.16 | length 12.3
  Top w0.15: P2.7 76.36,60.5 U1.16
NetP3_3: P3.3 R30.2 | length 26.3
  Bottom w0.25: P3.3 120.92,117.18 130.2,107.9 133.4,107.9 135.4,105.9 R30.2@136.75,105.9
NetP3_4: P3.4 U1.58 | length 78.6
  Top w0.15: U1.58 89,69.4 87.2,71.2 87.2,75.6 91.9,80.3 105.2,80.3 107.6,82.7 107.6,107.6 112.5,112.5 117,112.5 118.38,113.88 P3.4
NetP3_6: P3.6 U1.59 | length 74
  Top w0.15: U1.59 88.5,69.405 86.7,71.205 86.7,75.7 91.8,80.8 105,80.8 107.1,82.9 107.1,108.1 113.3,114.3 P3.6
NetP3_11: P3.11 U1.60 | length 73.8
  Top w0.15: U1.60 88,69.41 86.2,71.21 86.2,75.8 91.7,81.3 104.8,81.3 106.6,83.1 106.6,108 100.6,114 P3.11
NetP3_12: P3.12 U1.61 | length 74.6
  Top w0.15: U1.61 87.5,69.415 85.7,71.215 85.7,75.9 91.6,81.8 104.6,81.8 106.1,83.3 106.1,107.4 98.06,115.44 P3.12
NetP3_13: P3.13 U1.62 | length 75.4
  Top w0.15: U1.62 87,69.42 85.2,71.22 85.2,76 91.5,82.3 104.4,82.3 105.6,83.5 105.6,106.9 95.52,116.98 P3.13
NetP3_14: P3.14 U1.63 | length 76.2
  Top w0.15: U1.63 86.5,69.425 84.7,71.225 84.7,76.1 91.4,82.8 104.2,82.8 105.1,83.7 105.1,106.4 92.98,118.52 P3.14
NetP3_15: P3.15 T10.3 | length 11.9
  Top w0.5: P3.15 90.44,115.26 91,114.7 T10.3
NetP4_1: P4.1 U3.11 | length 23
  Top w0.25: U3.11 95.75,93.75 101.62,87.88 P4.1
NetP4_2: P4.2 U3.10 | length 20.3
  Top w0.25: U3.10 93.85,93.25 99.08,88.02 P4.2
NetP4_3: P4.3 U3.9 | length 17.7
  Top w0.25: U3.9 91.95,92.75 96.54,88.16 P4.3
NetP4_4: P4.4 U3.8 | length 14.8
  Top w0.25: U3.8 89.75,92.25 94,88 P4.4
NetP4_5: P4.5 U3.7 | length 11.6
  Top w0.25: U3.7 86.95,91.75 91.46,87.24 P4.5
NetP4_6: P4.6 U3.6 | length 10
  Top w0.25: U3.6 83.45,90.45 84.3,89.6 86.8,89.6 88.92,87.48 P4.6
NetP4_7: P4.7 U3.5 | length 8.4
  Top w0.25: U3.5 82.95,90.15 84.3,88.8 85.5,88.8 86.38,87.92 P4.7
NetP5_2: P5.2 R26.2 R27.2 U5.5 | length 13.5
  Top w0.25: P5.2 132.3,104.4 135.7,107.8 R27.2 ; R26.2 R27.2 ; U5.5 138.2,109 137.9,109.3 R27.2
NetP6_1: P6.1 T3.3 T5.2 | length 8.9
  Top w0.5: T3.3 T5.2 P6.1
NetP6_2: P6.2 T4.3 T6.2 | length 6.4
  Top w0.5: P6.2 T6.2 T4.3
NetP7_2: P7.2 R17.1 R28.1 | length 24.3
  Top w0.25: R28.1 v1(46.8,69.7) ; P7.2 55.9,78.9 56.6,79.6 R17.1
  Bottom w0.25: v1(46.8,69.7) 46.8,72.3 49.4,74.9 53.9,74.9 55.9,76.9 P7.2
NetP8_2: P8.2 R18.2 R29.1 | length 18.1
  Top w0.25: R29.1 60.4,63 ; P8.2 58.6,61.2 60.4,63 ; R18.2 66.9,65.3 64.6,63 60.4,63
NetR1_1: R1.1 U1.3 U3.24 | length 36.6
  Top w0.15: v1(76,88) 75.9,87.9 v1(75.9,81.5) 75.9,74.5 83.4,67 U1.3
  Top w0.25: v1(78.5,81.5) R1.1 ; v1(78.6,91.3) 79.05,91.75 U3.24
  Bottom w0.25: v1(75.9,81.5) v1(78.5,81.5) ; v1(76,88) 76,88.7 v1(78.6,91.3)
NetR2_1: R2.1 U1.2 U3.22 | length 35.8
  Top w0.15: U3.22 78.25,92.75 76.7,91.2 v1(76.7,80.5) 76.7,74.8 84,67.5 U1.2
  Top w0.25: v1(78.5,80.5) R2.1
  Bottom w0.25: v1(76.7,80.5) v1(78.5,80.5)
NetR3_1: R3.1 U1.1 U3.23 | length 32.8
  Top w0.15: R3.1 77.6,79.5 77.5,79.6 ; U3.23 78.55,92.25 77.5,91.2 77.5,79.6 ; U1.1 84.6,68 77.5,75.1 77.5,79.6
NetR4_2: R4.2 U3.12 | length 3.3
  Top w0.25: U3.12 84.95,94.25 85.3,94.6 R4.2
NetR5_2: R5.2 U3.13 | length 4.4
  Top w0.25: U3.13 83.45,95.75 84.2,96.5 84.8,96.5 85.4,97.1 R5.2
NetR6_2: R6.2 U3.14 | length 3.7
  Top w0.25: U3.14 82.95,96.15 84.1,97.3 R6.2
NetR7_2: R7.2 U3.15 | length 3.4
  Top w0.25: U3.15 82.45,96.25 82.8,96.6 R7.2
NetR8_2: R8.2 U3.16 | length 3.4
  Top w0.25: R8.2 81.5,96.7 81.95,96.25 U3.16
NetR9_2: R9.2 U3.17 | length 3.8
  Top w0.25: R9.2 80.2,97 81.45,95.75 U3.17
NetR10_2: R10.2 U3.18 | length 4.1
  Top w0.25: R10.2 78.9,97.6 80.95,95.55 U3.18
NetR11_1: R11.1 U3.4 | length 5.8
  Top w0.25: U3.4 82.45,89.25 82.9,88.8 R11.1
NetR12_1: R12.1 U3.3 | length 5.8
  Top w0.25: R12.1 81.6,88.9 81.95,89.25 U3.3
NetR13_1: R13.1 U3.2 | length 6.1
  Top w0.25: R13.1 80.3,88.8 81.45,89.95 U3.2
NetR14_1: R14.1 U3.1 | length 6.5
  Top w0.25: R14.1 79,88.4 80.95,90.35 U3.1
NetR15_2: R15.2 U3.20 | length 2.9
  Top w0.15: R15.2 78.3,93.8 78.35,93.75 U3.20
NetR16_1: R16.1 U1.14 U4.1 | length 24.6
  Top w0.15: R16.1 68.7,66.6 69.1,66.2 ; U4.1 69.64,66.74 69.1,66.2 ; U1.14 69.7,61.5 69.1,62.1 69.1,66.2
NetR17_2: R17.2 T1.1 | length 3.9
  Top w0.25: R17.2 64.6,79.6 66.8,77.4 T1.1
NetR18_1: R18.1 T2.1 | length 2.5
  Top w0.25: R18.1 66.95,68.45 T2.1
NetR19_1: R19.1 T1.3 | length 4.4
  Top w0.25: R19.1 66.8,80.9 T1.3
NetR19_2: R19.2 T3.1 | length 34.2
  Top w0.25: T3.1 51.65,64.3 48.1,64.3 47.8,64.6 47.8,78.4 50.3,80.9 R19.2
NetR20_1: R20.1 T4.1 | length 4.7
  Top w0.25: T4.1 64.55,64.45 65.3,65.2 R20.1
NetR20_2: R20.2 T2.3 | length 6.3
  Top w0.25: R20.2 65.3,71.8 66.8,73.3 T2.3
NetR21_1: R21.1 U1.5 | length 27.7
  Top w0.15: R21.1 72.5,76 82.5,66 U1.5
NetR21_2: R21.2 T5.1 | length 16
  Top w0.25: T5.1 49.4,74.2 51.2,76 R21.2
NetR22_1: R22.1 T6.1 | length 4.3
  Top w0.25: R22.1 60.9,70.5 T6.1
NetR22_2: R22.2 U1.6 | length 27.4
  Top w0.15: R22.2 73.2,74.7 82.4,65.5 U1.6
NetR24_2: R24.2 U5.2 | length 1.6
  Top w0.25: R24.2 139.7,109.6 U5.2
NetR25_1: R25.1 U1.53 U5.8 | length 77
  Top w0.15: v1(91.2,70.8) 91.5,70.5 U1.53
  Top w0.25: U5.8 139.2,105 138.9,104.7 R25.1 139.3,104.1 139.9,103.5 v1(140,103.5)
  Bottom w0.25: v1(91.2,70.8) 91.2,73.3 94.3,76.4 121.6,76.4 136.1,90.9 136.1,102.2 137.4,103.5 v1(140,103.5)
NetR28_2: R28.2 T8.1 | length 6.2
  Top w0.25: T8.1 R28.2
NetR29_2: R29.2 T9.1 | length 5.4
  Top w0.25: T9.1 50.85,61.15 52.7,63 R29.2
NetR31_1: R31.1 U1.64 | length 40.8
  Top w0.15: v1(83.9,73.2) 83.9,71 84.4,70.5 84.9,70.5 86,69.4 U1.64
  Top w0.25: v1(89.5,104.5) 90,105 R31.1
  Bottom w0.25: v1(83.9,73.2) 83.9,86.6 88.4,91.1 88.4,103.4 v1(89.5,104.5)
NetR31_2: R31.2 T10.1 | length 2.3
  Top w0.25: R31.2 90,108.85 T10.1
NetT1_2: T1.2 U1.4 | length 21.1
  Top w0.15: T1.2 71.7,77.4 82.6,66.5 U1.4
NetT2_2: T2.2 U1.7 | length 19.1
  Top w0.15: T2.2 76.3,70.9 82.2,65 U1.7
NetT7_1: T7.1 U5.9 | length 7.9
  Top w0.25: T7.1 139.55,100.75 140.525,101.725 140.525,104.775 139.7,105.6 U5.9
NetU1_11: U1.11 U4.6 | length 9.2
  Top w0.15: U4.6 80.7,64.2 81.9,63 U1.11
NetU1_12: U1.12 U4.5 | length 8.9
  Top w0.15: U4.5 81.27,62.93 81.7,62.5 U1.12
NetU1_13: U1.13 U4.2 | length 20.1
  Top w0.15: U4.2 70.27,65.47 69.8,65 69.8,62.6 70.4,62 U1.13
NetU1_31: U1.31 U2.1 | length 2.1
  Top w0.25: U2.1 93,58.3 ; 93,59.4 U1.31
  Top w0.45: 93,58.3 93,59.4
NetU1_50: U1.50 U5.7 | length 71.9
  Top w0.25: U1.50 93,71.8 v1(93.9,72.7) ; v1(137.6,101.8) 137.6,104.3 138.7,105.4 U5.7
  Bottom w0.25: v1(93.9,72.7) 97.1,75.9 122.2,75.9 137.6,91.3 v1(137.6,101.8)
S_LOCK: T9.2 U1.15 | length 38
  Top w0.15: T9.2 50.4,58.6 52,57 61.6,57 65.6,61 U1.15
S_UNLOCK: T8.2 U1.18 | length 45.2
  Top w0.15: T8.2 46.8,57.2 49.275,54.725 74.504,54.725 77.044,57.265 81.565,57.265 82.95,58.65 85.65,58.65 86.5,59.5 U1.18
VBAT: C1.2 C2.2 C3.2 C4.2 C5.2 C6.2 C7.2 C8.2 C25.2 C26.2 C27.2 C28.2 C30.2 C31.2 C37.2 C38.2 P1.1 P2.2 P3.2 P7.1 P8.1 R1.2 R2.2 R3.2 R4.1 R5.1 R6.1 R7.1 R8.1 R9.1 R10.1 R11.2 R12.2 R13.2 R14.2 R15.1 R16.2 R23.2 R25.2 R30.3 R32.2 T3.2 T4.2 T7.3 T10.2 U1.10 U1.37 U1.39 U1.44 U1.54 U3.21 U4.3 U4.7 U4.8 U5.10 | length 86.4
  Top w0.25: R16.2 v1(68.7,69.2) ; P2.2@71.52,50.56 P2.2@71.56,50.52 ; P2.2@71.54,50.6 P2.2 ; R15.1 76.6,93.4 v1(76.8,93.2) 78.2,93.2 78.25,93.25 U3.21 ; U4.8@76.76,66.7 U4.8 ; R10.1 v1(78.9,100.1) ; v1(79,83.5) R14.2 ; R9.1 v1(80.2,100.1) ; v1(80.3,83.5) R13.2 ; R3.2 v1(82,79.5) ; R2.2 v1(82,80.5) ; R1.2 v1(82,81.5) ; R8.1 v1(81.5,100.1) ; v1(81.6,83.5) R12.2 ; v1(82.8,63.9) 83.225,63.475 85.45,63.475 U1.10 ; R7.1 v1(82.8,100.1) ; R11.2 83.7,84.6 84.8,85.7 v1(84.9,85.7) ; C30.2@83.18,50.62 C30.2 ; R6.1 v1(84.1,100.1) ; R5.1 v1(85.4,100.1) ; v1(87.5,95.9) 88.1,95.3 R4.1 ; C3.2 v1(90.3,70.9) 90.3,70.5 91,69.8 U1.54 ; U1.37 95.8,62.5 C2.2 96.032,62.4 96.532,61.9 97.822,61.9 98.422,61.3 100.6,61.3 101.4,60.5 v1(101.4,60.2) ; U1.44 95,66 96.2,67.2 96.5,67.5 v1(96.5,68.3) ; R32.2 100.2,76 100.8,75.4 v1(100.8,73.9) ; R23.2 100.4,55.2 v1(100.8,55.6) ; R25.2 138.9,102.6 v1(139.1,102.4) ; T7.3 140.8,100.4 v1(141.2,100.8)
  Top w0.254: U1.39 96.259,63.5 C1.2@96.519,63.76
  Top w0.5: T3.2 52.55,66.35 ; v1(53,65.9) 52.55,66.35 ; v1(53,66.8) 52.55,66.35 ; T4.2 64.15,66.35 ; v1(64.2,67.1) 64.15,67.05 64.15,66.35 ; v1(64.5,66) 64.15,66.35 ; C31.2 P2.2@71.54,50.6 ; U4.3 72.9,64.2 v1(73.1,64.4) ; v1(74.4,67.6) 74.4,68.6 ; C25.2 C26.2 75.5,93.8 v1(75.7,93.8) R15.1 ; U4.8@76.76,66.7 75.3,66.7 v1(75,67) C27.2 74.4,68.6 ; U4.7 74.53,65.47 v1(73.8,66.2) C28.2 74.4,68.6 ; P1.1 C30.2@83.18,50.62 ; v1(91.5,107.4) 91.95,107.85 T10.2 ; 92,107.9 92.3,107.6 v1(92.3,107.4)
  Top w0.508: C1.2 C1.2@96.569,63.76 ; 96.569,63.853 v1(97.042,64.326)
  Bottom w0.25: v1(139.1,102.4) 140.9,102.4 141.3,102.8 141.3,103.6 140.3,104.6 R30.3
  other v1: 103.8,63.5 104.6,63.5 105.4,63.5 106.2,63.5 141.4,106.7 142.3,106.7 141.9,107.4 142.8,107.4
VIN: C34.2 C35.2 C36.2 P9.1 U5.1 | length 8.9
  Top w0.25: U5.1 140.2,110.1 ; P9.1@140.7,117.275 P9.1
  Top w0.7: 140.2,110.1 140.2,111.2 140.7,111.7 C36.2 C35.2 P9.1@140.7,117.275
pads on no net: P3.7 P3.8 P3.9 P3.10 P9.10 P9.11 U1.8 U1.26 U1.27 U1.28 U1.29 U1.30 U3.25
copper on no net:
  other v2: 81.65,92.45 82.75,92.45 81.65,93.55 82.75,93.55

## Polygon pours and split planes (outlines as drawn)
VBAT on PWR "VBAT_PWR" (solid, pour order 28): 149.7,127 149.7,111.8 149.6,111.7 149.6,47.7 38.2,47.7 38.2,127
NetC9_2 on PWR "PA_PWR" (solid, pour order 26): 90.3,60.6 89.4,59.7 89.4,58.1 89.6,57.9 90.7,57.9 92,59.2 94.1,59.2 95.6,57.7 95.6,55.3 96.5,54.4 97.3,54.4 98.9,56 100.1,56 100.5,56.4 100.5,58.8 98.7,60.6 98.7,62.1 97.2,63.6 96.5,63.6 96.2,63.9 96.2,66.9 95.9,67.2 95.2,67.9 95.2,69.8 94.9,70.1 94,70.1 93.7,69.8 93.7,61.1 93.2,60.6
GND on PWR "Top_GND" (solid, remove dead copper, pour order 14): 86.5,67.5 93,67.5 93,61 92.9,61 92.6,60.7 90.2,60.7 88.6,59.1 88.6,55.3 87.9,54.6 87.1,53.8 86.3,53 85.9,52.6 84.4,52.6 84,53 84,57.6 86.9,60.5 86.9,60.6 86.8,60.7 86.5,60.7
GND on PWR "GND_PWR" (solid, pour order 24): 89.4,57.7 90.8,57.7 92.1,59 94,59 94.7,58.3 95.4,57.6 95.4,55.2 95.9,54.7 97,53.6 98.6,53.6 99,53.2 99,48.2 89.4,48.2
GND on GND "Top_GND" (solid, remove dead copper, pour order 18): 38.2,127 38.2,48.2 91.7,48.2 91.7,52.7 97.8,52.7 97.8,48.2 97.9,48.3 149,48.3 149,127
GND on Bottom "Bottom_GND" (solid, remove dead copper, pour order 20): 38.2,127 38.2,47.7 149.6,47.7 149.6,127
GND on Top "Top_GND" (solid, remove dead copper, pour order 8): 38.2,127 38.2,47.7 149.6,47.7 149.6,127

## Other copper
Top:
  rectangle net VBAT: 75.1,93.3 76.1,93.6
  rectangle net VBAT: 75.5,93.3 76.6,93.8
  rectangle net GND: 97.746,48.206 98.472,49.458
  rectangle net GND: 93.6,48.2 94.1,48.976
  rectangle: 42,110 44,112
  rectangle net GND: 93.546,56.7 94.4,58.376
  rectangle net GND: 91.6,56.4 92.454,58.376
  region net NetC33_2: 138.2,107.1 137.9,106.8 137.9,106.2 136.5,104.8 136.5,104.7 135.9,104.1 135.9,102.4 135.3,101.8 134.3,101.8 134.3,100.6 135.9,100.6 137.7,98.8 137.7,97.2 137.8,97.2 138.5,96.5 138.7,96.5 138.7,96.7 138.8,96.8 138.4,97.2 138.4,98.85 136.7,100.55 136.7,104.3 138.2,105.8
  region net VBAT: 101.9,62.4 102.3,62 107.2,62 107.2,63 106.3,63.9 103.7,63.9 102.9,63.1 102.1,63.1 101.9,62.9
  region net GND: 139.7,117 139.7,112.1 139.5,111.9 138,111.9 137.8,112.1 137.8,117
  region net VBAT: 140.1,107.1 140.8,107.1 142.3,108.6 143.8,108.6 144,108.4 144,106 143.8,105.8 141.3,105.8 140.7,106.4 140.1,106.4
  pour cut-out: 69.8,54.4 73,54.4 73.5,54.9 81,54.9 83.9,52 85.8,52 85.8,49.8 85.6,49.6 82.7,49.6 82.3,49.2 82.3,48.8 82.1,48.6 70.3,48.6 69.8,49.1
  pour cut-out: 66.2,49.8 66.3,49.7 69.8,49.7 69.8,51.8 66.3,51.8 66.2,51.7
  pour cut-out: 75,78.5 75,74.9 75.1,74.8 76.7,74.8 77.1,74.8 77.3,74.8 77.8,74.3 78,74.3 78.8,73.5 79.7,73.5 79.7,74 78.1,75.6 78.1,78.5
  pour cut-out: 67.7,82.9 47.9,82.9 45.5,80.5 45.5,56.9 48.6,53.8 71.6,53.8 72.2,54.4 72.2,57.8 76.8,62.4 76.8,73.8
  pour cut-out: 41,113 51,113 51,107 41,107
  pour cut-out: 89.5,121.4 89.5,115 90,114.5 90,111.6 90.1,111.5 91.9,111.5 91.9,115 91.4,115.5 91.4,121.4
  pour cut-out: 102.6,84 102.6,88.1 95.8,94.9 91.2,94.9 89.7,96.4 89.7,99.6 88.1,101.2 78.1,101.2 77.3,100.4 77.3,96.1 76.4,95.2 73.2,95.2 72.3,94.3 71.6,93.6 71.6,91.4 72.5,90.5 74.6,90.5 75.1,90 75.1,89.1 75,89 75,78.3 75.3,78 81.8,78 82.9,79.1 82.9,83.4 83.5,84
  pour cut-out: 141.4,107 141.6,106.8 141.6,105.4 142,105 146.5,105 146.7,105.2 146.7,109.1 146.3,109.5 143.4,109.5 143,109.9 143,110 142.4,109.4 141.4,109.4
  pour cut-out: 149,48.2 149.587,48.2 149.6,48.213 149.6,127 149,127
  pour cut-out: 118.2,48.206 149.594,48.206 149.6,48.2 149.6,47.7 118.2,47.7
  pour cut-out: 63.304,48.206 38.206,48.206 38.2,48.2 38.2,47.7 63.304,47.7
  pour cut-out: 89,111.8 92,111.8 93,110.8 93,107.6 93.4,107.2 93.4,105.2 91.9,103.7 88.5,103.7 88.1,104.1 88.1,110.9
  pour cut-out: 141.8,107 142,106.8 142,96.5 141,95.5 137.4,95.5 136.9,96 136.9,98.7 136.3,99.3 128.5,99.3 128.1,99.7 128.1,102.5 128.5,102.9 131.5,102.9 131.5,104.5 134,107
  pour cut-out: 136,108.5 136.5,109 142.5,109 143,109.5 143,118.8 142.7,119.1 137.6,119.1 137.3,118.8 137.3,112.5 136.8,112 134.5,112 133.6,111.1 133.6,108.9 134,108.5
  pour cut-out: 86.6,125 126.7,125 127.7,124 127.7,122.6 127.7,121 126.7,120 120,120 119.5,119.5 119.5,113.5 117.5,111.5 112.9,111.5 108.4,107 108.4,95.3 108.4,82.3 105.3,79.2 91.9,79.2 87.6,74.9 87.6,73.6 87.5,73.5 83.8,73.5 83.8,76.3 91.3,83.8 103.7,83.8 104.2,84.3 104.2,105.5 101.9,107.8 92.1,117.6 92.1,120.8 91.5,121.4 86.6,121.4 86.1,121.9 86.1,124.5
  pour cut-out: 87.5,73.5 87.6,73.6 87.6,74.9 89.3,76.6 100.9,76.6 101.5,76 101.5,73.4 103.4,71.5 103.4,70.1 104.6,68.9 104.6,66.5 108.1,63 108.1,61.3 103,61.3 102.7,61 102.7,53.6 97.2,53.6 94.8,56 94.8,58 93.4,59.4 91.4,59.4 91.2,59.2 91.2,57 89,57 88.656,56.656 88.656,53.856 88.1,53.3 88.1,52 87.9,51.8 86.9,51.8 86.7,52 83.9,52 78.8,57.1 78.8,73.5
  pour cut-out: 93.762,49.082 92.187,49.082 92.187,52.613 92.289,52.613 92.289,54.975 93.711,54.975 93.711,52.613 93.762,52.613 93.762,49.082
  pour cut-out: 64.819,48.207 118.2,48.206 118.2,48.1 118.2,47.7 63.304,47.7 63.304,47.8 63.304,48.206 63.614,48.207
  pour cut-out: 95.054,47.668 97.243,47.668 97.243,48.976 97.746,48.976 97.746,52.668 91.746,52.668 91.746,48.976 95.054,48.976
  text "1" at 42.8,108.1 h1.52
GND:
  rectangle: 44,110 46,112
  pour cut-out: 91.7,52.7 97.8,52.7 97.8,48.2 91.7,48.2
  pour cut-out: 41,113 51,113 51,107 41,107
  text "2" at 44.4,108.1 h1.52
PWR:
  rectangle: 46,110 48,112
  pour cut-out: 91.7,52.7 97.8,52.7 97.8,47.7 91.7,47.7
  pour cut-out: 91.7,48.2 91.7,47.7 38.2,47.7 38.2,48.2
  pour cut-out: 97.8,48.2 97.8,47.7 149.6,47.7 149.6,48.2
  pour cut-out: 41,113 51,113 51,107 41,107
  pour cut-out: 149,48.2 149.9,48.2 149.9,127 149.1,127
  text "3" at 46.5,108.1 h1.52
Bottom:
  rectangle: 48,110 50,112
  pour cut-out: 83.9,70 83.9,69.874 83.651,69.625 82.944,69.625 83.319,70
  pour cut-out: 137.6,104.574 135.826,104.574 132.9,107.5 130,107.5 120.5,117 120.5,122.5 120.4,122.6 121.3,122.6 121.3,117.4 130.4,108.3 133.6,108.3 133.8,108.1 133.9,108.1 135.5,106.5 137.6,106.5
  pour cut-out: 140.8,104.3 140.8,105.4 140.7,105.5 139.2,105.5 139.1,105.4 139.1,104.3
  pour cut-out: 52.1,79.3 59.7,79.3 59.7,76.7 52.1,76.7
  pour cut-out: 54.7,60.9 54.7,58.3 62.4,58.3 62.4,60.9
  pour cut-out: 53.9,69.8 53.9,67.2 59,67.2 59,69.8
  pour cut-out: 70.3,59.5 81.3,59.5 81.6,59.2 81.6,57.8 82.1,57.3 93.514,57.3 94.674,58.46 95.34,58.46 96.1,57.7 96.1,56.5 96.2,56.4 96.9,56.4 97.3,56 97.3,55 96.8,54.5 84.9,54.5 81.4,51 81.4,49.7 81,49.3 70.3,49.3 69.9,49.7 69.9,59.1
  pour cut-out: 88.8,70.8 88.751,70.849 85.745,70.849 85.1,70.204 85.1,70.2 88.8,70.2
  pour cut-out: 76.401,88 76.4,88.001 76.4,88.538 78.987,91.125 78.987,91.46 78.75,91.697 78.403,91.697 78.4,91.7 78.282,91.582 78.282,91.544 75.599,88.861 75.599,88
  pour cut-out: 75.5,81.9 75.7,82.1 78.7,82.1 78.9,81.9 78.9,80.501 78.901,80.101 78.7,79.9 75.7,79.9 75.5,80.1
  pour cut-out: 81.2,94 81.2,92 83.2,92 83.2,94
  pour cut-out: 102.241,75.559 122.559,75.559 138.2,91.2 138.2,101.2 138.6,101.6 139.7,101.6 140.8,102.7 140.8,104.3 140.5,104.6 137.3,104.6 135.3,102.6 135.3,90.8 121.6,77.1 101.3,77.1 101,76.8
  pour cut-out: 38.2,48.2 38.2,47.7 149.6,47.7 149.6,48.2
  pour cut-out: 91.7,52.7 97.8,52.7 97.8,48.2 91.7,48.2
  pour cut-out: 86.8,70.5 88.5,70.5 88.5,70.4 89.8,69.1 94.3,69.1 94.7,68.7 94.7,57.9 96.2,56.4 110.3,56.4 110.7,56.8 110.7,69.5 109.8,70.4 104.8,70.4 103.7,71.5 103.7,74.1 101,76.8 88.9,76.8 86.8,74.7
  region net NetC13_2: 104.1,67.6 104.3,67.8 104.3,68.8 104.2,68.9 102.9,68.9 102.8,68.8 100.2,68.8 98.1,66.7 96.5,66.7 96,66.2 96,62.4 96.7,61.7 96.7,60.3 96.9,60.3 97,60.4 97,61.9 96.4,62.5 96.4,65.9 96.8,66.3 98.3,66.3 98.4,66.4 99.8,67.8 102.6,67.8 102.8,67.6
  pour cut-out: 41,113 51,113 51,107 41,107
  pour cut-out: 149,48.2 149,127 149.9,127 149.9,48.2
  text "4" at 48.5,108.1 h1.52

## Silkscreen, mask and mechanical layers (free items; w line width, h text height)
Top Overlay:
  lines w0.254: 95.1,69.5 96.4,70.8 96.4,75.7 96.4,80.4 95.4,81.4 ; 96.3,60.8 97.2,60.8 97.6,60.4 97.6,59.8 98.2,59.2 107.5,59.2 110.9,59.2 112.3,60.6 112.3,67.8 110.9,69.2 102.6,69.2 102.1,68.7 ; 101.1,68.3 101.7,68.3 102.1,68.7 ; 132.7,115.9 133.6,115 137.2,115 137.2,110.1 137.6,109.7 138.5,109.7 ; 102.1,68.7 102.1,68.7
  text "IoT lock V1.0" at 144.7,59.5 h1.52 r90
  text "Designed in Denmark by fmarko" at 147.1,59.5 h1.52 r90
Bottom Overlay:
  lines w0.254: 126,125.5 134,125.5 ; 134,125.5 134,89.5 54,89.5 54,125.5 134,125.5 ; 60,95.5 60,96.4 60,119.5 128,119.5 128,95.5 60,95.5

## Text inside footprints (layer, text, board x,y; h text height)
P1: Top Overlay "2" at 78.068,48.08 h1.27 r90; Top Overlay "1" at 80.608,48.588 h1.27 r90; Top Overlay "7" at 80.608,59.764 h1.27 r90; Top Overlay "8" at 78.068,59.764 h1.27 r90
P2: Top Overlay "2" at 72.068,48.08 h1.27 r90; Top Overlay "1" at 74.608,48.588 h1.27 r90; Top Overlay "7" at 74.608,59.764 h1.27 r90; Top Overlay "8" at 72.068,59.764 h1.27 r90